# EAGLE board Test board - MCP73871 (EAGLE 9.6.2)
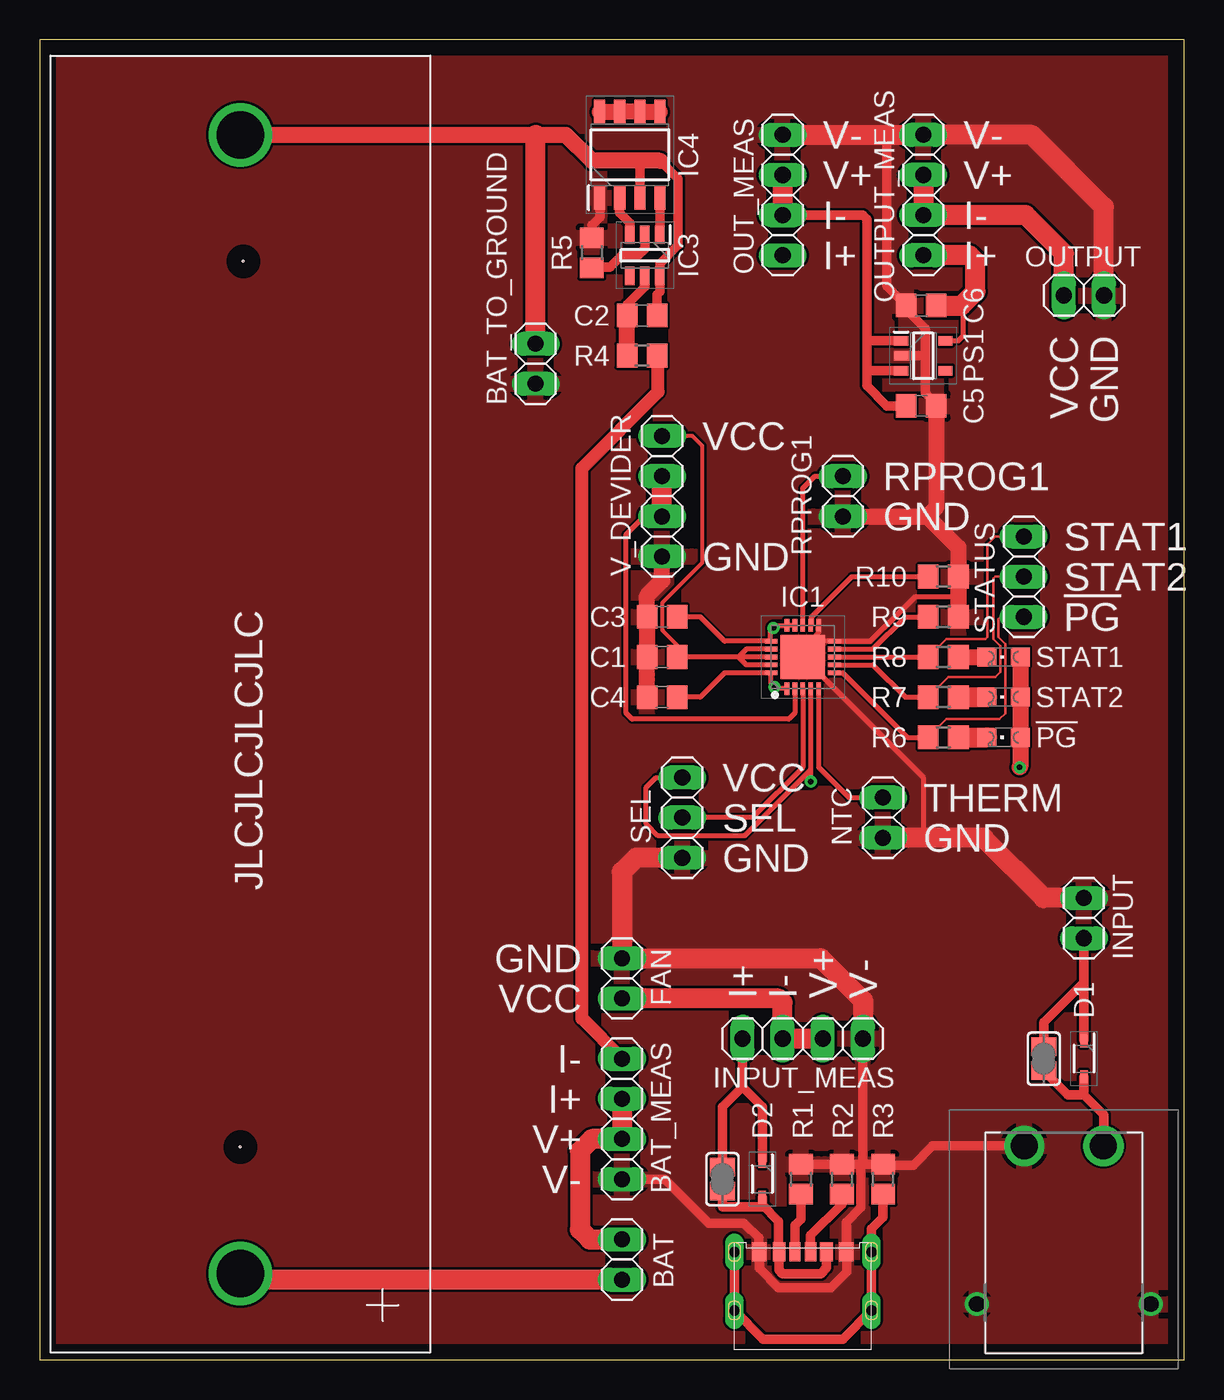
[diagram p0: board, top side]
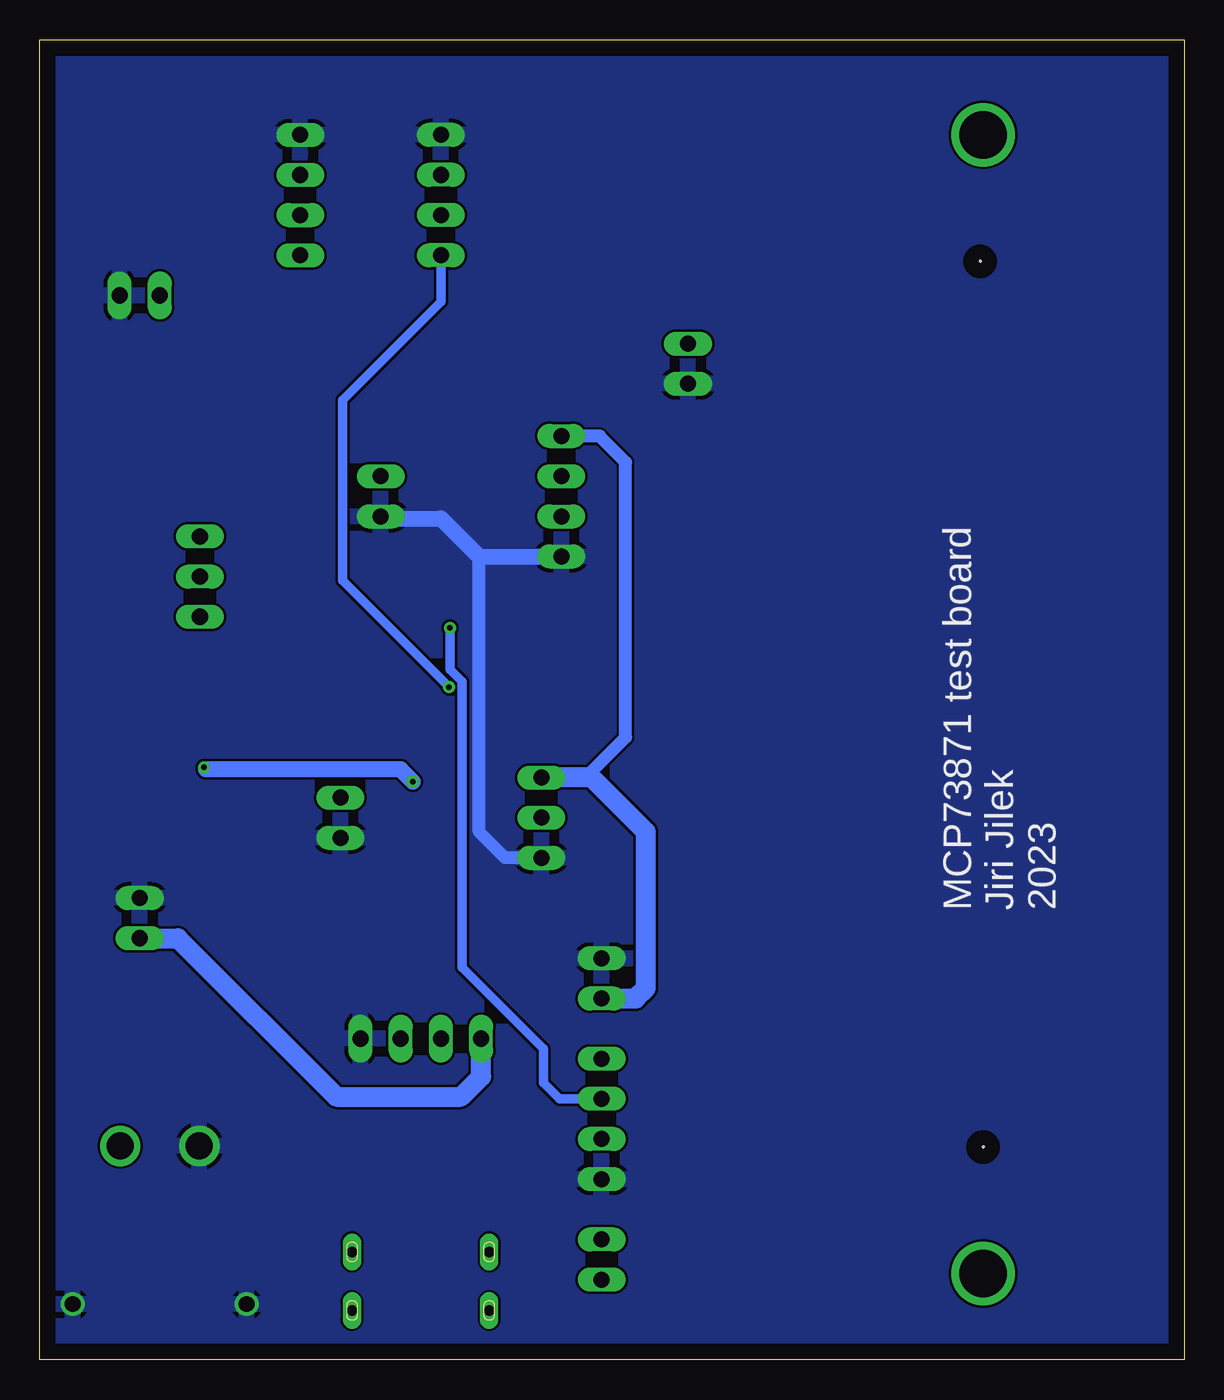
[diagram p1: board, bottom side, seen from below]

Size 72.37 x 83.49 mm. Coordinates in mm from the lower left corner, seen from the top.
Outline: 0,0 72.37,0 72.37,83.49 0,83.49 0,0
Copper layers (1*16): Top 0.035mm / dielectric 1.5mm / Bottom 0.035mm
Design rules "default": minimum track width 6mil, minimum drill 0.35mm, track to track 6mil, track to pad 6mil, pad to pad 6mil, via to via 6mil, smd to smd 6mil, copper to edge 40mil, drill to drill 6mil, minimum pad ring 10mil, minimum via ring 8mil, stop-mask expansion 4mil, vias tented up to drill 0mil, thermal gap 10mil

## Footprints (pad centres in the part's own frame; a part is rotated, then mirrored left to right if it is on the bottom)
1X02 = drill 1.016 long: 1 -1.27,0; 2 1.27,0
1X04 = drill 1.016 long: 1 -3.81,0; 2 -1.27,0; 3 1.27,0; 4 3.81,0
C0805 = smd 1.3 x 1.5: 1 -0.95,0; 2 0.95,0
SODFL2512X80N = smd 0.84 x 0.46: 1 -1.15,0; 2 1.15,0
QFN50P400X400X100-21N = smd 0.8 x 0.3: 1 -2,1; 2 -2,0.5; 3 -2,0; 4 -2,-0.5; 5 -2,-1; 11 2,-1; 12 2,-0.5; 13 2,0; 14 2,0.5; 15 2,1 | smd 0.3 x 0.8: 6 -1,-2; 7 -0.5,-2; 8 0,-2; 9 0.5,-2; 10 1,-2; 16 1,2; 17 0.5,2; 18 0,2; 19 -0.5,2; 20 -1,2 | smd 2.8 x 2.8: 21 0,0
SOT95P285X140-6N = smd 1.15 x 0.6: 1 -1.3,0.95; 2 -1.3,0; 3 -1.3,-0.95; 4 1.3,-0.95; 5 1.3,0; 6 1.3,0.95
SOIC127P600X175-8N = smd 1.525 x 0.7: 1 -2.712,1.905; 2 -2.712,0.635; 3 -2.712,-0.635; 4 -2.712,-1.905; 5 2.712,-1.905; 6 2.712,-0.635; 7 2.712,0.635; 8 2.712,1.905
XT30PWM = drill 1.7 pad 2.55: 1 -2.5,-5.912; 2 2.5,-5.912 | drill 1 pad 1.5: 3 5.5,4.088; 4 -5.5,4.088
CHIPLED_0805 = smd 1.2 x 1.2: A 0,-1.05; C 0,1.05
SOT95P280X125-5N = smd 0.9 x 0.6: 1 -1.4,0.95; 2 -1.4,0; 3 -1.4,-0.95; 4 1.4,-0.95; 5 1.4,0.95
R0805 = smd 1.3 x 1.5: 1 -0.95,0; 2 0.95,0
1X03 = drill 1.016 long: 1 -2.54,0; 2 0,0; 3 2.54,0
SJ = smd 1.168 x 1.6: 1 -0.762,0; 2 0.762,0
USCX-06FX-XXMX-01 = smd 0.7 x 1.2: CC1 0.5,-1.75; CC2 -0.5,-1.75 | smd 0.9 x 1.2: GND1 2.75,-1.75; GND2 -2.75,-1.75 | drill 0.65 pad 1.092 long: SHIELD1 4.325,1.95; SHIELD2 4.325,-1.75; SHIELD3 -4.35,-1.75; SHIELD4 -4.35,1.95 | smd 0.8 x 1.2: VBUS1 1.5,-1.75; VBUS2 -1.5,-1.75
BLOSSOM-BLM-18650-1PCS = drill 3: 1 -72,0; 2 0,0 | hole 0.089: -64,0; -8,-0.19

## Placement (x,y rotation side)
BAT  [1X02]  36.83,6.35 270 top
BAT_MEAS  [1X04]  36.83,15.24 270 top
BAT_TO_GROUND  [1X02]  31.37,62.99 90 top
C1  10u  [C0805]  39.37,44.45 180 top
C2  100n  [C0805]  38.1,66.04 0 top
C3  4u7  [C0805]  39.37,46.99 180 top
C4  4u7  [C0805]  39.37,41.91 180 top
C5  470n  [C0805]  55.75,60.33 0 top
C6  470n  [C0805]  55.75,66.67 180 top
D1  PMEG2010EJ,115  [SODFL2512X80N]  66.04,19.05 270 top
D2  PMEG2010EJ,115  [SODFL2512X80N]  45.7,11.43 270 top
FAN  [1X02]  36.83,24.13 270 top
IC1  MCP73871-2CCI_ML  [QFN50P400X400X100-21N]  48.26,44.45 90 top
IC3  AP9101CK6-ADTRG1  [SOT95P285X140-6N]  38.27,69.85 270 top
IC4  FDS6898A  [SOIC127P600X175-8N]  37.32,76.2 90 top
INPUT  [1X02]  66.04,27.94 270 top
INPUT_MEAS  [1X04]  48.26,20.32 0 top
J1  XT30PW-M  [XT30PWM]  64.77,7.62 180 top
LED1  !PG  [CHIPLED_0805]  60.96,39.37 90 top
LED2  STAT2  [CHIPLED_0805]  60.96,41.91 90 top
LED3  STAT1  [CHIPLED_0805]  60.96,44.45 90 top
NTC  [1X02]  53.34,34.29 90 top
OUT_MEAS  [1X04]  46.99,73.66 270 top
OUTPUT  [1X02]  66.04,67.31 0 top
OUTPUT_MEAS  [1X04]  55.88,73.66 90 top
PS1  BU33SD5WG-TR  [SOT95P280X125-5N]  55.88,63.5 0 top
R1  5k1  [R0805]  48.14,11.43 90 top
R2  5k1  [R0805]  50.74,11.43 90 top
R3  1M  [R0805]  53.34,11.43 90 top
R4  330R  [R0805]  38.1,63.5 0 top
R5  2k7  [R0805]  34.92,70 270 top
R6  470  [R0805]  57.15,39.37 180 top
R7  470  [R0805]  57.15,41.91 180 top
R8  470  [R0805]  57.15,44.45 180 top
R9  1k  [R0805]  57.15,46.99 0 top
R10  100k  [R0805]  57.15,49.53 0 top
RPROG1  [1X02]  50.8,54.61 90 top
SEL  [1X03]  40.64,34.29 90 top
SJ1  [SJ]  43.18,11.43 90 top
SJ2  [SJ]  63.5,19.05 90 top
STATUS  [1X03]  62.23,49.53 270 top
U$1  USBC-6P  [USCX-06FX-XXMX-01]  48.26,5.08 180 top
U$2  BLOSSOM-BLM-18650-1PCS  [BLOSSOM-BLM-18650-1PCS]  12.7,77.47 90 top
V_DEVIDER  [1X04]  39.37,54.61 90 top

## Library data of the parts
BAT BAT_TO_GROUND INPUT RPROG1 SEL V_DEVIDER = pinhead
BAT_MEAS INPUT_MEAS OUTPUT_MEAS = pinhead; I: I+; IM: I-; V: V+; VM: V-
C1-C6 = rcl; SPICEPREFIX: C
D1 D2 = 1-component-search; ARROW_PART_NUMBER: PMEG2010EJ,115; ARROW_PRICE-STOCK: https://www.arrow.com/en/products/pmeg2010ej115/nexperia?region=nac; DESCRIPTION: Schottky Diodes & Rectifiers SCHOTTKY 20V 1A; HEIGHT: 0.8mm; MANUFACTURER_NAME: Nexperia; MANUFACTURER_PART_NUMBER: PMEG2010EJ,115; MOUSER_PART_NUMBER: 771-PMEG2010EJ-T/R; MOUSER_PRICE-STOCK: https://www.mouser.co.uk/ProductDetail/Nexperia/PMEG2010EJ115?qs=LOCUfHb8d9umE8j0ERLykg%3D%3D
FAN = pinhead; GND: GND
IC1 = 1-component-search; ARROW_PART_NUMBER: MCP73871-2CCI/ML; ARROW_PRICE-STOCK: https://www.arrow.com/en/products/mcp73871-2cciml/microchip-technology?region=europe; DESCRIPTION: Li-Ion Charger USB/DC 4.2V TE LBO QFN20; HEIGHT: 1mm; MANUFACTURER_NAME: Microchip; MANUFACTURER_PART_NUMBER: MCP73871-2CCI/ML; MOUSER_PART_NUMBER: 579-MCP73871-2CCI/ML; MOUSER_PRICE-STOCK: https://www.mouser.co.uk/ProductDetail/Microchip-Technology/MCP73871-2CCI-ML?qs=qXsUupcbpXyQfJ2clznZxw%3D%3D
IC3 = 1-component-search; ARROW_PART_NUMBER: AP9101CK6-ADTRG1; ARROW_PRICE-STOCK: https://www.arrow.com/en/products/ap9101ck6-adtrg1/diodes-incorporated?region=nac; DESCRIPTION: Battery Management Protect w/ Pwr Down 1-Cell LI 3.0uA 3.5V; HEIGHT: 1.4mm; MANUFACTURER_NAME: Diodes Inc.; MANUFACTURER_PART_NUMBER: AP9101CK6-ADTRG1; MOUSER_PART_NUMBER: 621-AP9101CK6-ADTRG1; MOUSER_PRICE-STOCK: https://www.mouser.co.uk/ProductDetail/Diodes-Incorporated/AP9101CK6-ADTRG1?qs=W66WzN12R3ZRpT78WZD49g%3D%3D
IC4 = 1-component-search; ARROW_PART_NUMBER: FDS6898A; ARROW_PRICE-STOCK: https://www.arrow.com/en/products/fds6898a/on-semiconductor?region=nac; DESCRIPTION: ON SEMICONDUCTOR - FDS6898A. - MOSFET, DUAL, N, SMD, SO-8; HEIGHT: 1.75mm; MANUFACTURER_NAME: onsemi; MANUFACTURER_PART_NUMBER: FDS6898A; MOUSER_PART_NUMBER: 512-FDS6898A; MOUSER_PRICE-STOCK: https://www.mouser.co.uk/ProductDetail/ON-Semiconductor-Fairchild/FDS6898A?qs=rFoKx6q3%2F911Dc6GES2NNA%3D%3D
J1 = 1-component-search; DESCRIPTION: 30A Low Temperature Rise Fire Retardant Plug; HEIGHT: 5mm; MANUFACTURER_NAME: Amass; MANUFACTURER_PART_NUMBER: XT30PW-M
LED1-LED3 = led
NTC = pinhead; GND: GND; INPUT: THERM
OUT_MEAS = pinhead; I_MINUS: I-; I_PLUS: I+; V_MINUS: V-; V_PLUS: V+
OUTPUT = pinhead; VCC: V
PS1 = 1-component-search; DESCRIPTION: LDO regulator,3.3V,0.5A,standby,SSOP5 ROHM BU33SD5WG-TR, LDO Voltage Regulator, 0.5A, 3.3 V +/-2%, 1.7 6 Vin, 5-Pin SSOP; HEIGHT: 1.25mm; MANUFACTURER_NAME: ROHM Semiconductor; MANUFACTURER_PART_NUMBER: BU33SD5WG-TR; MOUSER_PART_NUMBER: 755-BU33SD5WG-TR; MOUSER_PRICE-STOCK: https://www.mouser.co.uk/ProductDetail/ROHM-Semiconductor/BU33SD5WG-TR?qs=%2FKR40Cd6GUrQDzRkUEt69Q%3D%3D
R1-R10 = rcl; SPICEPREFIX: R
SJ1 SJ2 = jumper
STATUS = pinhead; PG: !PG
U$1 = USBC6P
U$2 = battery-holders

## Nets
!PG: IC1.6 R6.2 STATUS.3
!TE: IC1.9 R9.1
BAT+: BAT.2 U$2.1
BAT-: BAT_TO_GROUND.2 C2.2 IC3.6 IC4.3 U$2.2
CC1: R1.1 U$1.CC1
CC2: R2.1 U$1.CC2
DRAIN: IC4.5 IC4.6 IC4.7 IC4.8
G1: IC3.1 IC4.4
G2: IC3.3 IC4.2
GND: BAT_MEAS.4 BAT_TO_GROUND.1 C1.2 C3.2 C4.2 C5.2 C6.2 FAN.1 IC1.10 IC1.11 IC1.21 IC4.1 INPUT.1 INPUT_MEAS.4 J1.2 J1.3 J1.4 NTC.1 OUT_MEAS.1 OUTPUT.2 OUTPUT_MEAS.4 PS1.2 R1.2 R2.2 R3.2 R5.1 R9.2 R10.2 RPROG1.1 SEL.1 U$1.GND1 U$1.GND2 V_DEVIDER.1
LDO_VIN: C5.1 OUT_MEAS.2 OUT_MEAS.3 PS1.1 PS1.3
N$6: C2.1 IC3.5 R4.1
N$7: LED1.C R6.1
N$8: LED2.C R7.1
N$11: LED3.C R8.1
N$14: BAT_MEAS.1 R4.2
OUT: C4.1 IC1.1 IC1.20 OUT_MEAS.4
OUTPUT: OUTPUT.1 OUTPUT_MEAS.2 OUTPUT_MEAS.3
PROG1: IC1.13 RPROG1.2
PROG3: IC1.12 R10.1
PV_IN: D1.2 J1.1 SJ2.1
S: R3.1 U$1.SHIELD1 U$1.SHIELD2 U$1.SHIELD3 U$1.SHIELD4
SEL: IC1.3 SEL.2
STAT1: IC1.8 R8.2 STATUS.1
STAT2: IC1.7 R7.2 STATUS.2
THERM: IC1.5 NTC.2
VBAT: BAT.1 BAT_MEAS.2 BAT_MEAS.3 C3.1 IC1.14 IC1.15 IC1.16
VBUS: D2.2 SJ1.1 U$1.VBUS1 U$1.VBUS2
VCC: C1.1 FAN.2 IC1.4 IC1.17 IC1.18 IC1.19 INPUT_MEAS.2 INPUT_MEAS.3 LED1.A LED2.A LED3.A SEL.3 V_DEVIDER.4
VIN: D1.1 D2.1 INPUT.2 INPUT_MEAS.1 SJ1.2 SJ2.2
VM: IC3.2 R5.2
VOUT: C6.1 OUTPUT_MEAS.1 PS1.5
VPCC: IC1.2 V_DEVIDER.2 V_DEVIDER.3

## Tracks (layer width: path | path; a pad name or v marks a point on that pad's centre or on a via)
!PG
  Top 0.152: R6.2 57.34,40.51 60.71,40.51 61.07,40.88 61.07,45.28 60.63,45.72 60.63,46.86 60.76,46.99 STATUS.3
  Top 0.305: IC1.6 50.78,43.45 54.86,39.37 R6.2
!TE
  Top 0.305: IC1.9 52.7,44.95 54.74,46.99 R9.1
BAT+
  Top 1.27: BAT.2 13.09,5.08 U$2.1
BAT-
  Top 0.305: 39.24,68.53 IC3.6 | 37.96,75.8 37.97,75.82
  Top 0.61: C2.2 39.05,67.37 39.24,67.56 39.24,68.53 | IC3.6 39.22,69.32 40.39,70.48 40.39,74.68 39.24,75.82 | IC4.3 37.96,75.8
  Top 1.016: U$2.2 31.37,77.47 33.27,77.47 34.92,75.82 37.97,75.82 39.24,75.82
  Top 1.27: BAT_TO_GROUND.2 31.37,77.47
CC1
  Top 0.61: U$1.CC1 47.76,8.52 48.14,8.9 R1.1
CC2
  Top 0.61: U$1.CC2 48.76,7.87 50.74,9.85 R2.1
DRAIN
  Top 1.016: IC4.8 IC4.7 IC4.6 IC4.5
G1
  Top 0.305: IC3.1
  Top 0.61: IC4.4 IC3.1
G2
  Top 0.305: 37.34,71.17 IC3.3
  Top 0.61: IC4.2 36.69,72.53 37.34,71.88 37.34,71.17
GND
  Top 0.305: 49.28,45.47 49.29,45.45 IC1.10 52.55,45.45 54.55,47.45 54.56,47.45 55.37,48.26 58.1,48.26 | IC1.11 49.28,46.43 49.26,46.42 49.26,45.97 48.26,44.97 IC1.21 55.88,36.83 55.88,33.02 | 35.43,73.47 IC4.1
  Top 0.61: 51.94,12.19 51.95,12.19 51.95,9.64 51.01,8.7 U$1.GND2 51.05,6.79 51.05,5.59 50.04,4.57 46.74,4.57 45.51,5.8 U$1.GND1 45.48,6.86 45.48,7.71 44.54,8.65 42.34,8.65 39.56,11.43 BAT_MEAS.4 | 52.07,12.32 52.13,12.38 R3.2 53.4,12.32 55.24,12.32 56.46,13.53 J1.2 | 51.94,12.19 51.76,12.38 R2.2 R1.2 | INPUT_MEAS.4 52.07,12.32 | 52.07,12.32 51.94,12.19 | R5.1 34.92,71.75 35.43,72.26 35.43,73.47 | C5.2 56.7,60.45 56.01,61.15 56.01,63.12 | 56.01,63.37 56.01,65.22 54.8,66.42 C6.2 53.59,67.88 53.59,77.47 | 56.01,63.37 56.01,62.99 | PS1.2 55.88,63.5 56.01,63.37
  Top 1.016: R9.2 58.1,48.26 R10.2 58.1,51.37 56.13,53.34 | RPROG1.1 56.13,53.34 | C5.2 56.7,53.91 56.13,53.34 | C4.2 C1.2 C3.2 38.42,48.33 39.37,49.28 V_DEVIDER.1
  Top 1.27: INPUT_MEAS.4 52.07,22.73 49.4,25.4 FAN.1 36.83,30.86 37.72,31.75 SEL.1 | INPUT.1 63.5,29.21 59.69,33.02 55.88,33.02 NTC.1 | OUT_MEAS.1 53.59,77.47 OUTPUT_MEAS.4 62.74,77.47 67.31,72.9 OUTPUT.2
  Bottom 0.813: SEL.1 42.93,31.75 44.58,33.4 44.58,50.8
  Bottom 1.016: RPROG1.1 50.67,53.21 46.99,53.21 44.58,50.8 V_DEVIDER.1
  pour Top: 0,0 0,83.82 72.39,83.82 72.39,0
  pour Bottom: 0,0 0,83.82 72.39,83.82 72.39,0
LDO_VIN
  Top 0.61: C5.1 53.59,60.33 52.32,61.59 52.32,62.61 | 52.32,64.52 52.32,72.14 52.07,72.39 OUT_MEAS.3 | 52.32,64.52 52.32,62.61 | PS1.3 52.38,62.55 52.32,62.61 | PS1.1 52.39,64.45 52.32,64.52
  Top 1.27: OUT_MEAS.2 OUT_MEAS.3
N$6
  Top 0.61: IC3.5 38.27,67.86 37.15,66.74 C2.1
  Top 1.016: R4.1 C2.1
N$7
  Top 1.27: R6.1 LED1.C
N$8
  Top 1.27: R7.1 LED2.C
N$11
  Top 1.016: R8.1 LED3.C
N$14
  Top 0.813: BAT_MEAS.1 34.29,21.59 34.29,56.39 39.12,61.21 39.12,63.43 R4.2
OUT  (via drill 0.35)
  Top 0.305: C4.1 41.78,41.91 43.32,43.45 IC1.20 46.26,42.77 v46.48,42.55 46.58,42.45 IC1.1
  Bottom 0.61: v46.48,42.55 53.21,49.28 53.21,60.71 46.99,66.93 OUT_MEAS.4
OUTPUT
  Top 1.27: OUTPUT_MEAS.3 OUTPUT_MEAS.2 62.36,72.39 64.77,69.98 OUTPUT.1
PROG1
  Top 0.305: IC1.13 48.26,55.12 49.02,55.88 RPROG1.2
PROG3
  Top 0.305: IC1.12 48.8,46.49 48.8,46.97 51.36,49.53 R10.1
PV_IN
  Top 0.406: 67.31,13.57 J1.1
  Top 0.61: 66.04,16.76 67.31,15.49 67.31,13.57 | D1.2 66.04,16.76 | SJ2.1 65.02,16.76 66.04,16.76
S
  Top 0.61: R3.1 53.34,9.02 52.61,8.29 U$1.SHIELD3 U$1.SHIELD4 50.8,1.32 45.74,1.32 U$1.SHIELD1 U$1.SHIELD2
SEL
  Top 0.305: IC1.3 48.26,37.47 45.09,34.29 SEL.2
STAT1
  Top 0.152: R8.2 57.34,45.59 59.82,45.59 59.94,45.72 59.94,51.56 60.45,52.07 STATUS.1
  Top 0.305: IC1.8 R8.2
STAT2
  Top 0.152: R7.2 57.47,43.18 60.45,43.18 60.77,43.49 60.77,45.15 60.33,45.59 60.33,49.4 60.45,49.53 STATUS.2
  Top 0.305: IC1.7 52.7,43.95 54.74,41.91 R7.2
THERM
  Top 0.305: IC1.5 49.26,37.48 51.18,35.56 NTC.2
VBAT  (via drill 0.35)
  Top 0.305: C3.1 41.78,46.99 43.32,45.45 IC1.16 46.23,45.48 46.23,46.1 v46.42,46.29 46.58,46.45 IC1.15 IC1.14
  Top 1.27: BAT.1 34.8,7.62 34.16,8.26 34.16,13.21 34.92,13.97 BAT_MEAS.3 BAT_MEAS.2
  Bottom 0.61: v46.42,46.29 46.42,43.66 45.65,42.89 45.65,24.82 40.51,19.68 40.51,17.53 39.5,16.51 BAT_MEAS.2
VBUS
  Top 0.406: 46.74,6.85 U$1.VBUS1
  Top 0.61: D2.2 45.7,9.79 | 45.7,9.79 45.7,9.67 43.18,9.67 SJ1.1 | 45.7,9.79 46.74,8.76 46.74,6.85 | U$1.VBUS1 46.76,5.69 46.99,5.46 49.4,5.46 49.76,5.82 U$1.VBUS2
VCC  (via drill 0.35)
  Top 0.254: C1.1 40.32,45.2 39.39,46.12 39.39,47.9 41.91,50.42 41.91,57.78 41.27,58.42 V_DEVIDER.4
  Top 0.305: IC1.19 44.7,43.95 44.2,44.45 | 44.2,44.45 C1.1 | IC1.18 44.2,44.45 | IC1.17 44.7,44.95 44.2,44.45 | IC1.4 48.76,37.32 | 48.76,37.32 45.27,33.83 45.26,33.83 44.58,33.15 39.12,33.15 38.35,33.91 38.35,36.2 38.99,36.83 SEL.3 | 48.76,37.32 v48.76,36.58 v48.77,36.58
  Top 1.016: LED3.A LED2.A LED1.A 62.01,37.5 v61.98,37.47
  Top 1.27: INPUT_MEAS.3 INPUT_MEAS.2 46.99,22.61 46.74,22.86 FAN.2
  Bottom 0.305: 61.85,37.34 v61.98,37.47
  Bottom 0.813: SEL.3 37.85,36.83 35.31,39.37 35.31,56.77 36.96,58.42 V_DEVIDER.4
  Bottom 1.016: v48.77,36.58 49.53,37.34 61.85,37.34
  Bottom 1.27: FAN.2 34.67,22.86 34.04,23.5 34.04,33.4 37.47,36.83 SEL.3
VIN
  Top 0.61: D2.1 45.7,16.02 44.45,17.27 | 44.45,17.27 INPUT_MEAS.1 | SJ1.2 43.18,16 44.45,17.27 | INPUT.2 66.04,24.38 66.04,23.88 | 66.04,23.88 D1.1 | SJ2.2 63.5,21.34 66.04,23.88
  Bottom 1.27: INPUT.2 63.63,26.67 53.59,16.64 45.72,16.64 44.45,17.91 INPUT_MEAS.1
VM
  Top 0.61: IC3.2 38.27,70.28 37.85,69.85 36.83,69.85 36.07,69.09 34.96,69.09 R5.2
VOUT
  Top 0.305: PS1.5 58.1,64.45 58.42,64.77 58.42,66.55 58.29,66.67
  Top 1.27: C6.1 58.29,66.67 59.18,67.56 59.18,69.47 58.8,69.85 OUTPUT_MEAS.1
VPCC
  Top 0.305: IC1.2 47.76,40.9 47.37,40.51 37.47,40.51 37.08,40.89 37.08,52.2 38.23,53.34 V_DEVIDER.2
  Top 1.27: V_DEVIDER.2 V_DEVIDER.3

## Text on the board
tNames: JLCJLCJLCJLC
bNames: MCP73871 test board / Jiri Jilek / 2023